# Altium PCB PCB.PcbDoc
Units mm, origin at the board's own origin, x right, y up, seen from the top; angles counter-clockwise.
Board outline 107.7 x 80.52 mm, 2 copper layers (Top Layer, Bottom Layer); 19 components, 29 nets, 111 pads, 7 vias.
Unrouted connection lines stored in the file: 1.
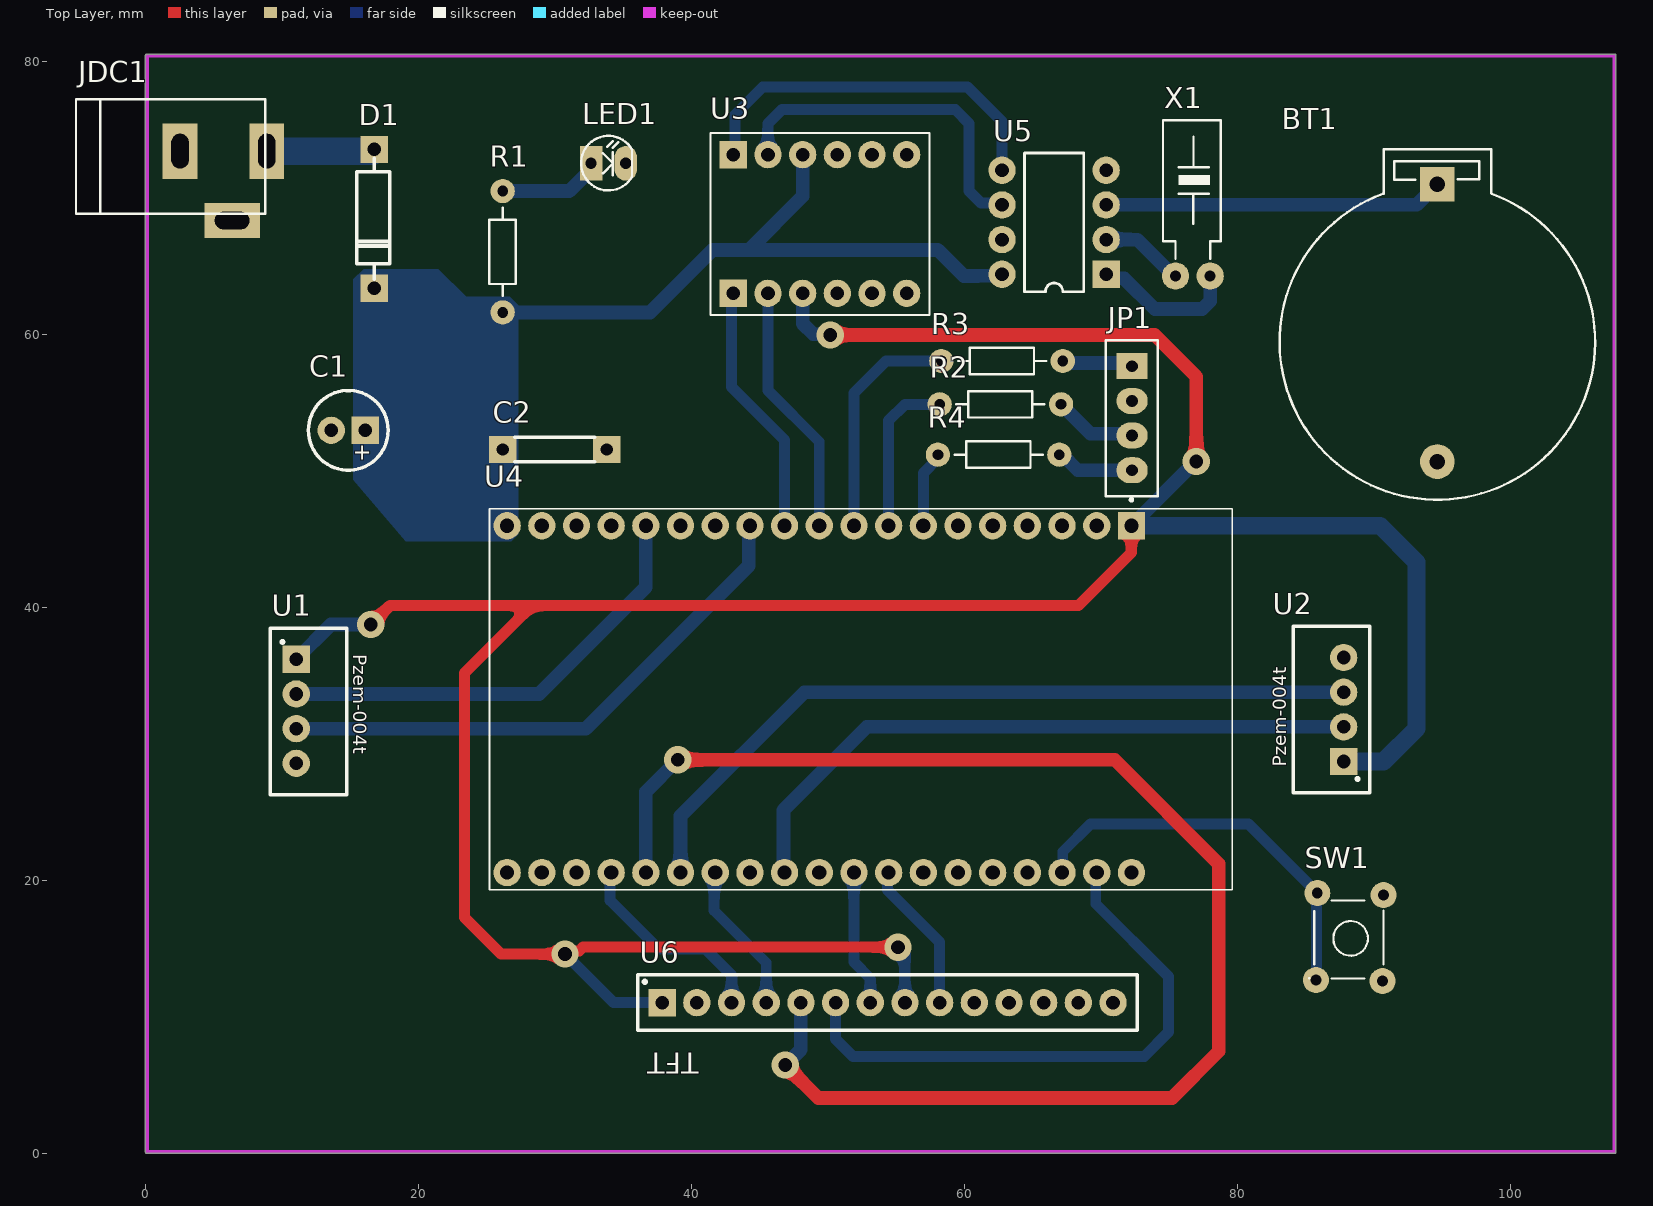
[diagram p0: Top Layer view]
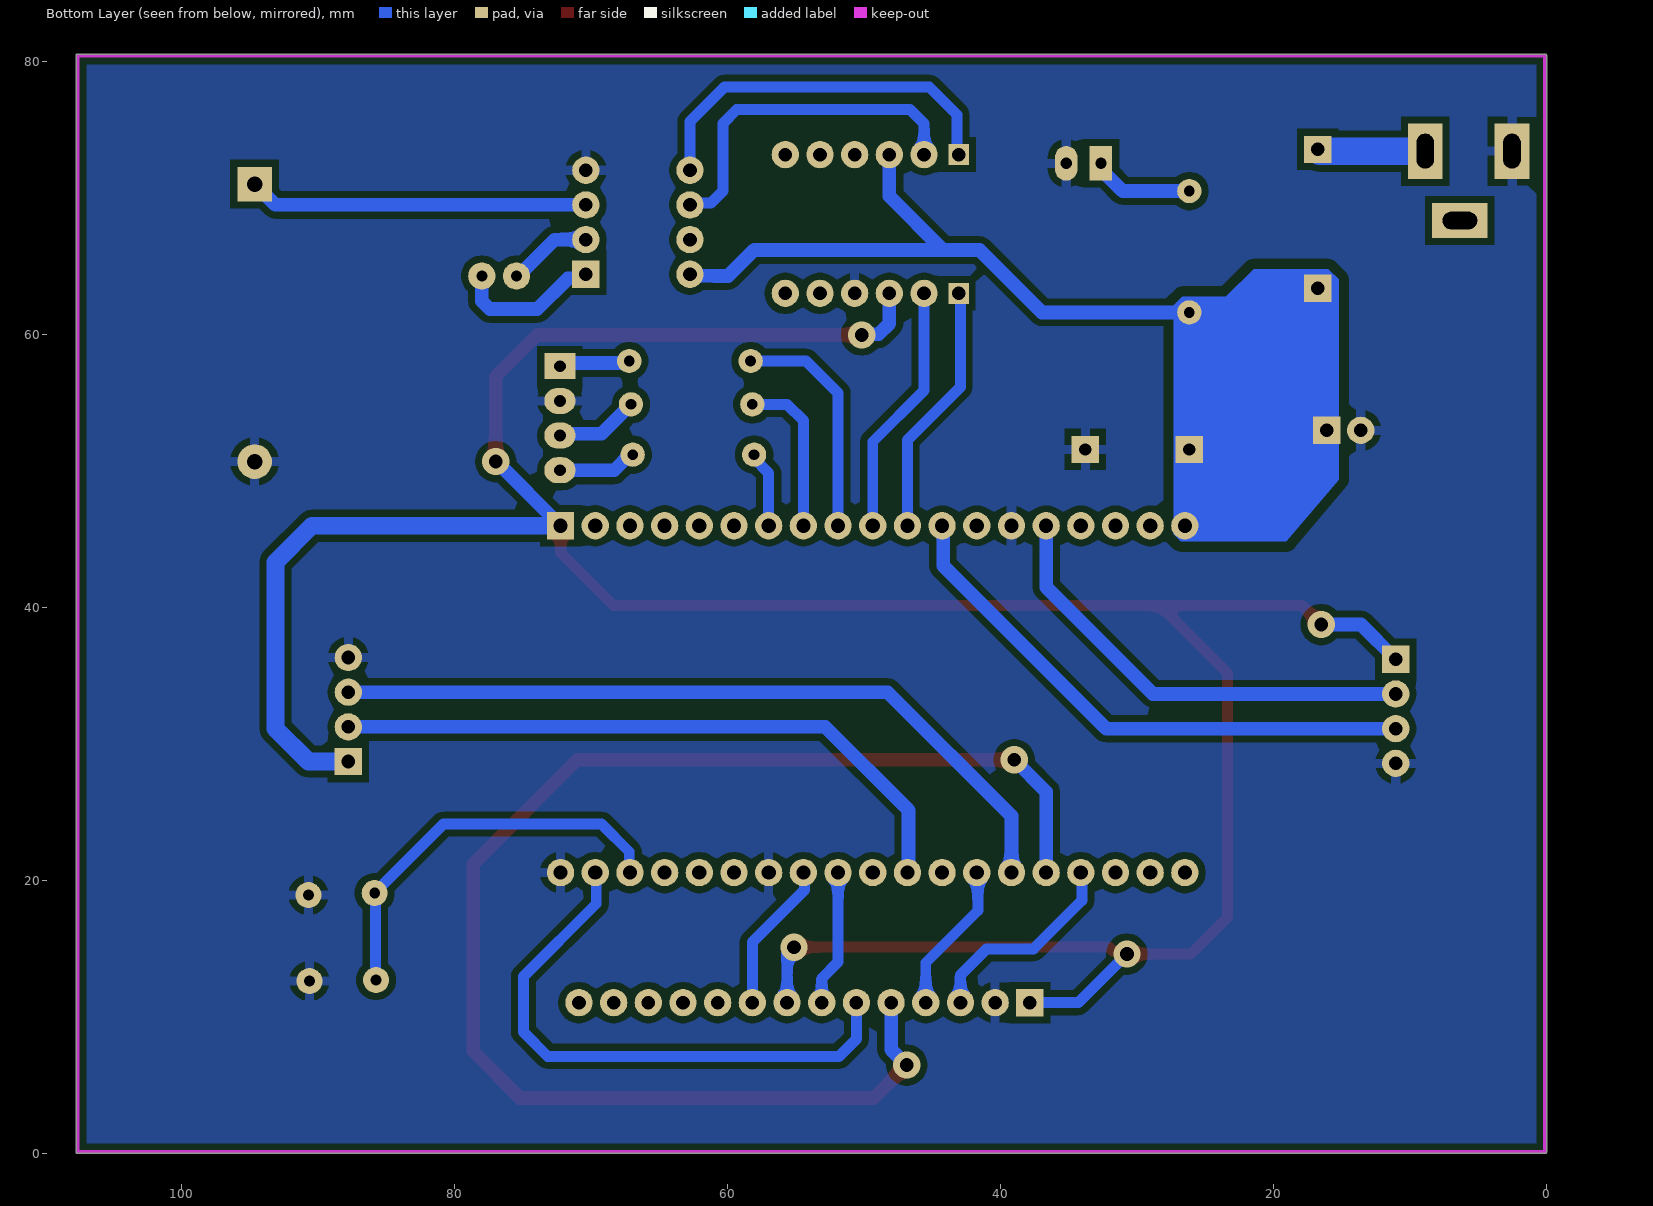
[diagram p1: Bottom Layer view, seen from below]
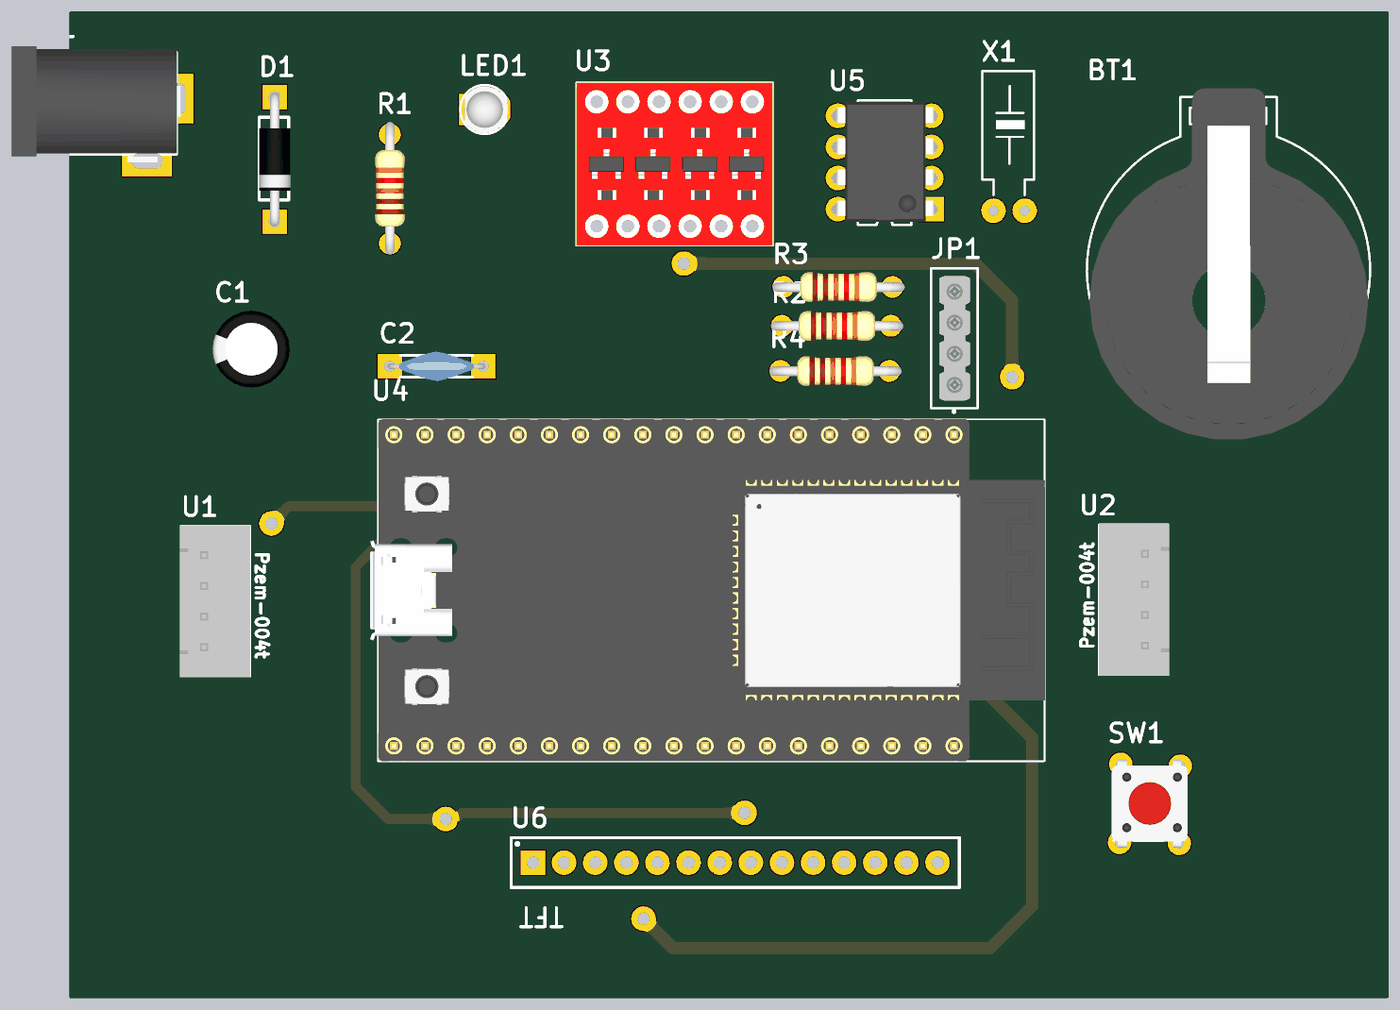
[diagram p2: 3D render of the assembled board from above, using the file's embedded part models]

## Layer stack, top to bottom
Top Solder: solder mask 0.0102, Solder Resist, Dk 3.5
Top Layer: signal copper 0.0356
Dielectric 1: dielectric 0.32, FR-4, Dk 4.8
Bottom Layer: signal copper 0.0356
Bottom Solder: solder mask 0.0102, Solder Resist, Dk 3.5

## Board outline
0,0.127 0,80.391 cw(c0.127,80.391) 0.127,80.518 107.569,80.518 cw(c107.569,80.391) 107.696,80.391 107.696,0.127 cw(c107.569,0.127) 107.569,0 0.127,0 cw(c0.127,0.127)

## Design rules (kind name [scope] priority, off if disabled: settings)
Clearance [All] p1: gap=0.5 ignorepadtopadclearanceinfootprint=FALSE except(0.75: Fill-Fill Fill-Poly Fill-Region Fill-Text Fill-Hole Poly-Poly Poly-Region Poly-Text Poly-Hole Region-Region Region-Text Region-Hole)
PolygonConnect [All] p1: connectstyle=Relief reliefconductorwidth=0.7 reliefentries=4 polygonreliefangle="90 Angle" airgapwidth=0.5
RoutingVias [All] p1: holewidth=0.711 width=1.27 viastyle="Through Hole" minholewidth=0.711 minwidth=1.27 maxholewidth=0.711 maxwidth=1.27
SolderMaskExpansion [All] p1: expansion=0.102 istentingtop=FALSE
SupplyNets "Schematic Supply Nets_2" [InNet('+5')] p1: voltage=0.000
SupplyNets "Schematic Supply Nets_1" [InNet('3V3')] p2: voltage=0.000
SupplyNets "Schematic Supply Nets" [InNet('GND')] p3: voltage=0.000
Width Diode [InNet('NetD1_1')] p1: maxlimit=2 minlimit=1 preferedwidth=1.8
Width 5V [InNet('+5')] p2: maxlimit=1.8 minlimit=1 preferedwidth=1.5
Width [All] p3: maxlimit=1 minlimit=0.6 preferedwidth=0.8
30 further rules are at their usual default settings.

## Components (designator, comment, footprint, x,y, rotation, side; value= is the part's Value field where it differs from the comment)
BT1 "PIN 3V" PIN3V 94.615,70.993 r270 top
C1 "Cap Pol" C8mm 14.859,52.959 r180 top
C2 "Capacitor Ceramic 2KV" 103/2KV 33.782,51.562 r180 top
D1 "Diode Power" DIODE/POW/1A 16.764,73.533 r270 top
JDC1 "Jac DC" DC-IN 5.715,70.866 r0 top
JP1 "JP4" jam4 72.238,50.038 r270 top value="Connector 4"
LED1 "LED" LED-3 32.639,72.517 r0 top value="LED 3 ly Single Colour"
R1 "1k" R1/4W 26.162,70.485 r270 top value="R1/4W - 1K"
R2 "10k" R1/4W 67.056,54.864 r180 top
R3 "10k" R1/4W 67.183,58.039 r180 top
R4 "10k" R1/4W 66.929,51.181 r180 top
SW1 "SW" SW4 90.678,18.923 r270 top value="Button chip 4 pin"
U1 "Pzem-004t-100A-CT" "Pzem-004t - duplicate1" 11.049,36.195 r270 top
U2 "Pzem-004t-100A-CT" "Pzem-004t - duplicate1" 87.757,28.702 r90 top
U3 "BOB-12009" CONV_BOB-12009 49.403,68.072 r90 top
U4 "ESP32-DEVKITC-32D" MODULE_ESP32-DEVKITC-32D 52.451,33.274 r270 top
U5 "Ds1307 RTC" Ds1307 70.358,64.389 r180 top
U6 "2.4\" TFT 240x320" "TFT - duplicate" 37.846,11.049 r90 top
X1 "32,768 Khz" XT32k 75.438,64.262 r90 top value=32,768khz

## Footprints (in the part's own frame and the unit in brackets; to place one, negate y for a bottom-side part, rotate by r counter-clockwise, add the part's x,y. Pads: shape width x height; smd on the part's side, far side on the other; paste and mask are expansions set on the pad)
103/2KV [mm]
  rect 2x2 hole 0.9: 1(0,0) 2(7.62,0)
  silkscreen extent 0.89,-0.89 6.73,0.89, body extent -0.19,-1.2 7.81,1.19, height 9.03
C8mm [mm]
  rect 2x2 hole 1: 1(-1.25,0)
  round 2 hole 1: 2(1.25,0)
  silkscreen extent -2.92,-2.92 2.92,2.92, body extent -3.15,-3.15 3.13,3.15, height 11.51
CONV_BOB-12009 [mm]
  round 2 hole 1: GND_1(5.08,-1.27) GND_2(-5.08,-1.27) HV(5.08,1.27) HV2(5.08,3.81) HV3(5.08,-3.81) HV4(5.08,-6.35) LV(-5.08,1.27) LV2(-5.08,3.81) LV3(-5.08,-3.81) LV4(-5.08,-6.35)
  rect 2x2 / inner round 1.524 / far side rect 1.524x1.524 hole 1: HV1(5.08,6.35) LV1(-5.08,6.35)
  silkscreen extent -6.67,-8.03 6.67,8.03, body extent -6.67,-8.03 6.67,8.03, height 2.8
DC-IN [mil] "Jac DC input"
  rect 100x160 hole 50 slot 100 at 90 deg: 1(125,100) 2(-125,100)
  rect 160x100 hole 50 slot 100 at 0 deg: 3(25,-100)
  silkscreen extent -425,-80 120,250, body extent -410,-105 134,269, height 434
DIODE/POW/1A [mm]
  rect 2x2 hole 1: 1(0,0) 2(10.16,0)
  silkscreen extent 0.64,-1.27 9.53,1.14, body extent -0.38,-1.28 10.54,1.28, height 2.55
Ds1307 [mm]
  rect 2x2 hole 1: 1(0,0)
  round 2 hole 1: 2(0,-2.54) 3(0,-5.08) 4(0,-7.62) 5(7.62,-7.62) 6(7.62,-5.08) 7(7.62,-2.54) 8(7.62,0)
  silkscreen extent 1.63,-8.89 5.99,1.27, body extent -0.82,-8.76 8.32,1.04, height 1.6
jam4 [mil]
  rect 75x90 hole 34: 1(-300,1)
  oval 75x90 hole 34: 2(-200,1) 3(-100,1) 4(0,1)
  silkscreen extent -375,-75 75,75, body extent -350,-49 50,51, height 704
LED-3 [mil] "LED 2 PIN, 3ly Only colour"
  rect 65x100 hole 32: 1(0,0)
  oval 65x100 hole 32: 2(100,0)
  silkscreen extent -29,-78 118,79, body extent -13,-75 125,75, height 217
MODULE_ESP32-DEVKITC-32D [mm]
  rect 2x2 hole 1.04: J2-1(-12.7,19.76)
  round 2 hole 1.04: J2-2(-12.7,17.22) J2-3(-12.7,14.68) J2-4(-12.7,12.14) J2-5(-12.7,9.6) J2-6(-12.7,7.06) J2-7(-12.7,4.52) J2-8(-12.7,1.98) J2-9(-12.7,-0.56) J2-10(-12.7,-3.1) J2-11(-12.7,-5.64) J2-12(-12.7,-8.18) J2-13(-12.7,-10.72) J2-14(-12.7,-13.26) J2-15(-12.7,-15.8) J2-16(-12.7,-18.34) J2-17(-12.7,-20.88) J2-18(-12.7,-23.42) J2-19(-12.7,-25.96) J3-1(12.7,19.76) J3-2(12.7,17.22) J3-3(12.7,14.68) J3-4(12.7,12.14) J3-5(12.7,9.6) J3-6(12.7,7.06) J3-7(12.7,4.52) J3-8(12.7,1.98) J3-9(12.7,-0.56) J3-10(12.7,-3.1) J3-11(12.7,-5.64) J3-12(12.7,-8.18) J3-13(12.7,-10.72) J3-14(12.7,-13.26) J3-15(12.7,-15.8) J3-16(12.7,-18.34) J3-17(12.7,-20.88) J3-18(12.7,-23.42) J3-19(12.7,-25.96)
  silkscreen extent -14.7,-27.25 13.95,27.15, body extent -13.97,-27.9 13.97,27.2, height 6.69
PIN3V [mil] "Socket PIN 3V"
  rect 100x100 hole 45: 1(0,0)
  round 100 hole 45: 2(800,0)
  silkscreen extent -100,-455 910,455, body extent -128,-447 1002,449, height 278
"Pzem-004t - duplicate1" [mm]
  rect 2x2 hole 1: 1(0,0)
  round 2 hole 1: 2(5.08,0) 3(2.54,0) 4(7.62,0)
  silkscreen extent -2.29,-1.91 9.91,3.68, body extent -2.39,-2.03 10.01,3.72, height 7
R1/4W [mil] "R 1/4W, 2 Pin, 350mil"
  round 70 hole 31: 1(0,0) 2(350,0)
  silkscreen extent 48,-38 302,38, body extent -40,-47 386,47, height 111
SW4 [mil] "SW button 4pin, 250 x250 mil"
  round 75 hole 31: 1(0,0) 2(245,-195) 3(248,-3) 4(-6,-191)
  silkscreen extent 15,-215 240,0, body extent -36,-220 276,24, height 276
"TFT - duplicate" [mm]
  rect 2x2 hole 1: 1(0,0)
  round 2 hole 1: 2(0,-2.54) 3(0,-5.08) 4(0,-7.62) 5(0,-10.16) 6(0,-12.7) 7(0,-15.24) 8(0,-17.78) 9(0,-20.32) 10(0,-22.86) 11(0,-25.4) 12(0,-27.94) 13(0,-30.48) 14(0,-33.02)
  silkscreen extent -2.03,-34.8 2.03,1.78
XT32k [mm] "Crystal 32k, 2 pin, real timer for DS1307"
  round 2 hole 0.813: 1(0,0) 2(0,-2.54)
  silkscreen extent 1.27,-3.3 11.4,0.91

## Part data
BT1: "Battery 3VDC"
C1: "Polarized Capacitor (Axial)", LatestRevisionDate=17-Jul-2002, LatestRevisionNote="Re-released for DXP Platform.", PackageReference=POLAR0.8, Published=8-Jun-2000, Publisher="Altium Limited"
C2: library part "Cap 2KV", LatestRevisionDate=17-Jul-2002, LatestRevisionNote="Re-released for DXP Platform.", PackageReference=RAD-0.3, Published=8-Jun-2000, Publisher="Altium Limited"
D1: PackageDocument=Aug-1999, ComponentLink1Description="Manufacturer Link", ComponentLink1URL=http://www.fairchildsemi.com/, ComponentLink2Description=Datasheet, ComponentLink2URL=http://www.fairchildsemi.com/ds/1N%2F1N5400.pdf, DatasheetDocument=1998, LatestRevisionDate=17-Jul-2002, LatestRevisionNote="Re-released for DXP Platform.", PackageReference=DO-201AD, Published=8-Jun-2000, Publisher="Altium Limited"
JDC1: library part DCIN, "Jac DC input"
JP1: library part "jam 4", "jam 4"
LED1: "LED Single colour Green and Red"
R1: library part R, "Resistor 1/4W"
R2 R3 R4: library part Res, "Res"
SW1: library part SW4, "Switch button 4 pin"
U3: "BSS138 - Logic-Level Translator Interface Evaluation Board", Package=None, Check_prices=https://www.snapeda.com/parts/BOB-12009/SparkFun/view-part/?ref=eda, MF=SparkFun, MP=BOB-12009, SnapEDA_Link=https://www.snapeda.com/parts/BOB-12009/SparkFun/view-part/?ref=snap
U4: "WiFi Development Tools (802.11) ESP32 General Development Kit, ESP32-WROOM-32D on the board", Package=None, Check_prices=https://www.snapeda.com/parts/ESP32-DEVKITC-32D/Espressif+Systems/view-part/?ref=eda, MF="Espressif Systems", MP=ESP32-DEVKITC-32D, SnapEDA_Link=https://www.snapeda.com/parts/ESP32-DEVKITC-32D/Espressif+Systems/view-part/?ref=snap
U5: library part Ds1307
X1: library part XT32k, "Crystal 32,768kHz for timer real"

## Via types
v1: diameter 2, hole 1, Top Layer to Bottom Layer, 7 vias

## Nets (pads, with @x,y where several pads share a name; then routed paths per layer and width w, separated by ;. In a path a pad name is that pad's centre, name@x,y a point inside that pad or via, vN(x,y) a via of type N, cw(c..) or ccw(c..) an arc to the next point about the centre after c; other vN are vias at no path point)
3V3: U1.1 U2.1 U3.LV U4.J2-1 U6.1 U6.8 | length 222.2
  Top Layer w0.8: v1(16.51,38.735) 17.907,40.132 28.321,40.132 ; v1(55.118,15.113) 32.053,15.113 31.774,14.835 30.964,14.835 v1(30.734,14.605) 26.035,14.605 23.368,17.272 23.368,35.179 28.321,40.132 ; U4.J2-1 72.211,44.017 68.326,40.132 28.321,40.132
  Top Layer w1: v1(50.165,59.944) 73.914,59.944 76.962,56.896 v1(76.962,50.673)
  Bottom Layer w0.8: v1(30.734,14.605) 34.29,11.049 U6.1 ; v1(55.118,15.113) 55.118,14.986 55.626,14.478 U6.8
  Bottom Layer w1: U1.1 13.589,38.735 v1(16.51,38.735) ; U3.LV 48.133,60.784 48.921,59.996 50.113,59.996 v1(50.165,59.944) ; U4.J2-1 76.91,50.673 v1(76.962,50.673)
  Bottom Layer w1.3: 73.279,45.974 90.424,45.974 93.091,43.307 93.091,31.115 90.678,28.702 U2.1
+5: C1.1 C2.2 D1.2 R1.2 U3.HV U4.J2-19 U5.8 | length 48.2
  Bottom Layer w1: R1.2 36.957,61.595 41.529,66.167 43.942,66.167 ; U3.HV 48.133,70.104 44.196,66.167 43.942,66.167 ; U5.8 62.623,64.274 60.956,64.274 60.944,64.262 59.944,64.262 58.039,66.167 43.942,66.167
GND: BT1.2 C1.2 C2.1 JDC1.2 JP1.2 LED1.2 SW1.1 SW1.3 U1.4 U2.4 U3.GND_2 U4.J2-14 U4.J3-1 U4.J3-7 U5.4 U6.2
NetBT1_1: BT1.1 U5.3 | length 24.9
  Bottom Layer w1: U5.3 93.091,69.469 BT1.1
NetD1_1: D1.1 JDC1.1 | length 7.9
  Bottom Layer w2: JDC1.1 16.637,73.406 D1.1
NetJP1_1: JP1.1 R3.1 | length 5.2
  Bottom Layer w1: R3.1 67.332,57.89 72.031,57.89 JP1.1
NetJP1_3: JP1.3 R2.1 | length 6.2
  Bottom Layer w1: R2.1 69.215,52.705 72.136,52.705 JP1.3
NetJP1_4: JP1.4 R4.1 | length 5.8
  Bottom Layer w1: R4.1 67.14,51.181 68.283,50.038 JP1.4
NetLED1_1: LED1.1 R1.1 | length 7.6
  Bottom Layer w1: R1.1 31.051,70.485 32.639,72.072 LED1.1
NetR2_2: R2.2 U4.J2-8 | length 11.9
  Bottom Layer w0.8: U4.J2-8 54.431,53.669 55.626,54.864 R2.2
NetR3_2: R3.2 U4.J2-9 | length 17.1
  Bottom Layer w0.8: U4.J2-9 51.891,55.701 54.229,58.039 R3.2
NetR4_2: R4.2 U4.J2-7 | length 5.6
  Bottom Layer w0.8: U4.J2-7 56.971,49.848 58.039,50.916 R4.2
NetSW1_2: SW1.2 SW1.4 U4.J3-3 | length 29.5
  Bottom Layer w0.8: U4.J3-3 67.183,20.626 67.183,22.098 69.215,24.13 80.772,24.13 SW1.4 85.776,19.025 85.776,12.751 SW1.2
NetU1_2: U1.2 U4.J2-12 | length 41
  Bottom Layer w1: U1.2 32.258,31.115 44.196,43.053 44.196,45.899 U4.J2-12
NetU1_3: U1.3 U4.J2-15 | length 33.3
  Bottom Layer w1: U1.3 28.829,33.655 36.651,41.477 U4.J2-15
NetU2_2: U2.2 U4.J3-14 | length 56.5
  Bottom Layer w1: U4.J3-14 39.191,24.713 48.26,33.782 U2.2
NetU2_3: U2.3 U4.J3-11 | length 48.1
  Bottom Layer w1: U4.J3-11 46.736,20.649 46.736,25.146 52.832,31.242 U2.3
NetU3_HV1: U3.HV1 U5.5 | length 28
  Bottom Layer w0.8: U3.HV1 43.18,73.279 43.18,76.073 45.212,78.105 60.198,78.105 62.738,75.565 U5.5
NetU3_HV2: U3.HV2 U5.6 | length 25.6
  Bottom Layer w0.8: U3.HV2 45.593,75.438 46.609,76.454 59.309,76.454 60.325,75.438 60.325,70.485 61.188,69.622 62.585,69.622 U5.6
NetU3_LV1: U3.LV1 U4.J2-11 | length 18.7
  Bottom Layer w0.8: U3.LV1 42.926,62.865 42.926,56.134 46.811,52.249 U4.J2-11
NetU3_LV2: U3.LV2 U4.J2-10 | length 18.6
  Bottom Layer w0.8: U3.LV2 45.593,55.88 49.351,52.122 U4.J2-10
NetU5_1: U5.1 X1.2 | length 10.7
  Bottom Layer w1: U5.1 70.658,64.089 71.674,64.089 73.914,61.849 77.392,61.849 77.978,62.435 X1.2
NetU5_2: U5.2 X1.1 | length 6.2
  Bottom Layer w1: U5.2 72.644,66.929 75.311,64.262 X1.1
TFT_CS: U4.J3-16 U6.3 | length 15.2
  Bottom Layer w0.8: U4.J3-16 34.036,20.499 34.036,18.542 37.592,14.986 41.021,14.986 42.926,13.081 U6.3
TFT_DC: U4.J3-15 U6.5 | length 104.9
  Top Layer w1: v1(38.989,28.829) 70.993,28.829 78.613,21.209 78.613,7.493 75.184,4.064 49.276,4.064 v1(46.863,6.477)
  Bottom Layer w1: U4.J3-15 36.651,26.491 v1(38.989,28.829) ; v1(46.863,6.477) 48.006,7.62 U6.5
TFT_MISO: U4.J3-8 U6.9 | length 11.1
  Bottom Layer w0.8: U4.J3-8 54.359,20.502 54.359,19.301 58.166,15.494 U6.9
TFT_MOSI: U4.J3-2 U6.6 | length 42.2
  Bottom Layer w0.8: U6.6 50.546,8.382 51.816,7.112 73.152,7.112 74.93,8.89 74.93,12.954 69.596,18.288 69.596,20.499 U4.J3-2
TFT_RST: U4.J3-13 U6.4 | length 11.1
  Bottom Layer w0.8: U4.J3-13 41.656,20.499 41.656,17.78 45.466,13.97 U6.4
TFT_SCK: U4.J3-9 U6.7 | length 10
  Bottom Layer w0.8: U4.J3-9 51.891,14.022 53.086,12.827 U6.7
pads on no net: JDC1.3 U3.GND_1 U3.HV3 U3.HV4 U3.LV3 U3.LV4 U4.J2-2 U4.J2-3 U4.J2-4 U4.J2-5 U4.J2-6 U4.J2-13 U4.J2-16 U4.J2-17 U4.J2-18 U4.J3-4 U4.J3-5 U4.J3-6 U4.J3-10 U4.J3-12 U4.J3-17 U4.J3-18 U4.J3-19 U5.7 U6.10 U6.11 U6.12 U6.13 U6.14

## Polygon pours and split planes (outlines as drawn)
GND on Bottom Layer "GND_L02_P001" (solid, remove dead copper, pour order 1): 0.127,80.391 0.127,0.127 107.569,0.127 107.569,80.391

## Keep-outs
Keep-Out Layer:
  lines w0.254: 0.127,0.127 107.569,0.127 107.569,80.391 0.127,80.391 0.127,0.127

## Other copper
Bottom Layer:
  region net +5: 15.24,49.355 15.24,64.008 16.002,64.77 21.463,64.77 23.495,62.738 26.67,62.738 27.305,62.103 27.305,45.339 26.797,44.831 19.05,44.831

## Text inside footprints (layer, text, board x,y; h text height)
C1: Top Overlay "+" at 16.561,51.841 h1.2 r180
U1: Top Overlay "Pzem-004t" at 15.24,36.576 h1 r270
U2: Top Overlay "Pzem-004t" at 83.566,28.321 h1 r90
U6: Top Overlay "TFT" at 40.513,7.366 h1.52 r180